# EAGLE board IR (EAGLE 9.2.0)
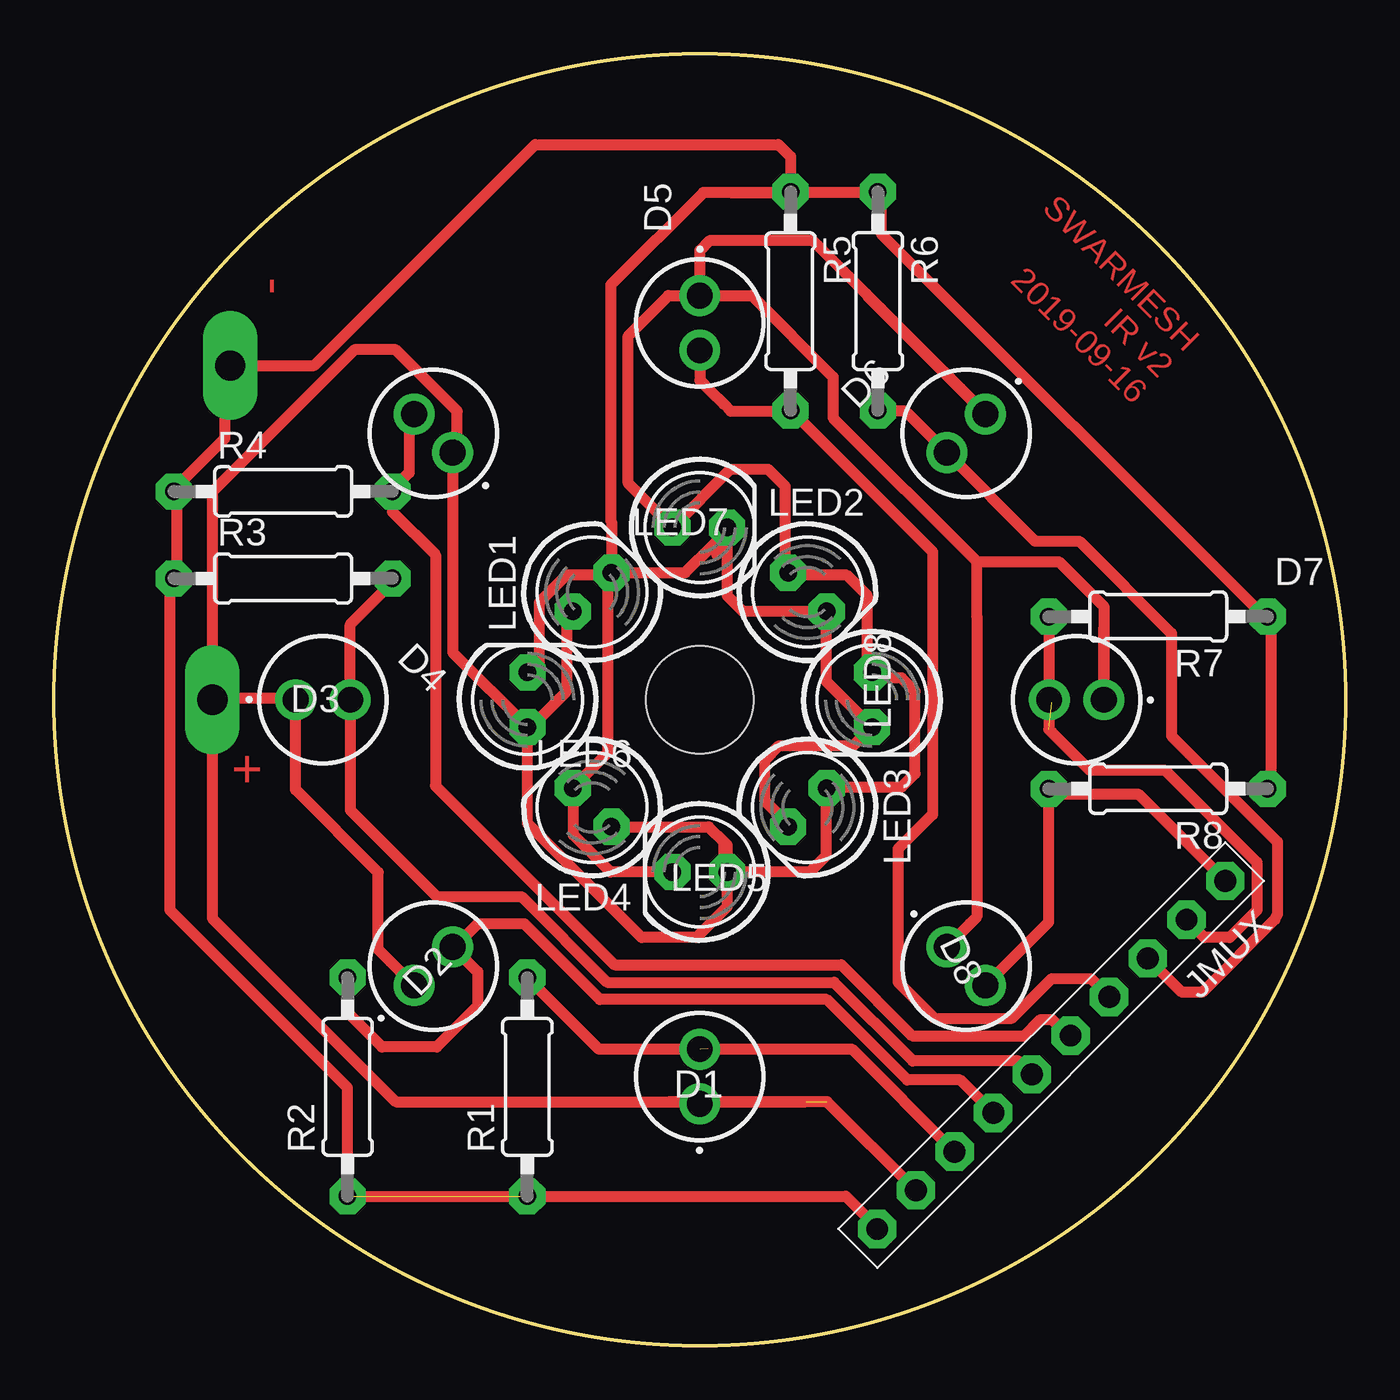
[diagram p0: board, top side]

Size 60 x 60 mm. Coordinates in mm from the lower left corner, seen from the top.
Outline: circle at 30,30 radius 30
Copper layers (1*16): Top 0.035mm / dielectric 1.5mm / Bottom 0.035mm
Design rules "default *": minimum track width 0.5mm, minimum drill 0.35mm, track to track 12mil, track to pad 12mil, pad to pad 12mil, via to via 12mil, smd to smd 6mil, copper to edge 40mil, drill to drill 6mil, minimum pad ring 10mil, minimum via ring 8mil, stop-mask expansion 4mil, vias tented up to drill 0mil, thermal gap 10mil
Holes 5 mm at 30,30

## Footprints (pad centres in the part's own frame; a part is rotated, then mirrored left to right if it is on the bottom)
SFH213_1 = drill 1.2 pad 1.9: 1 -1.27,0; 2 1.27,0
1X10-BIG = drill 1.016 pad 1.778 octagon: 1 -11.43,0; 2 -8.89,0; 3 -6.35,0; 4 -3.81,0; 5 -1.27,0; 6 1.27,0; 7 3.81,0; 8 6.35,0; 9 8.89,0; 10 11.43,0
1X1-BIGPOGO = drill 1.4 pad 2.54 long: P$1 0,0
LED5MM = drill 0.813 pad 1.676 octagon: A -1.27,0; K 1.27,0
0207/10 = drill 0.813 pad 1.676 octagon: 1 -5.08,0; 2 5.08,0

## Placement (x,y rotation side)
D1  SFH_203_PFA  [SFH213_1]  30,12.5 90 top
D2  SFH_203_PFA  [SFH213_1]  17.63,17.63 45 top
D3  SFH_203_PFA  [SFH213_1]  12.5,30 0 top
D4  SFH_203_PFA  [SFH213_1]  17.63,42.37 135 top
D5  SFH_203_PFA  [SFH213_1]  30,47.5 270 top
D6  SFH_203_PFA  [SFH213_1]  42.37,42.37 225 top
D7  SFH_203_PFA  [SFH213_1]  47.5,30 180 top
D8  SFH_203_PFA  [SFH213_1]  42.37,17.63 315 top
JMUX  PINHD-1X10  [1X10-BIG]  46.33,13.5 225 top
JP9  GND  [1X1-BIGPOGO]  8.19,45.52 90 top
JP10  3.3  [1X1-BIGPOGO]  7.37,30 90 top
LED1  [LED5MM]  22,30 90 top
LED2  [LED5MM]  30,38 0 top
LED3  [LED5MM]  38,30 270 top
LED4  [LED5MM]  30,22 180 top
LED5  [LED5MM]  35,25 225 top
LED6  [LED5MM]  25,25 135 top
LED7  [LED5MM]  25,35 45 top
LED8  [LED5MM]  35,35 315 top
R1  [0207/10]  21.99,12.02 90 top
R2  [0207/10]  13.64,12.02 90 top
R3  [0207/10]  10.65,35.63 0 top
R4  [0207/10]  10.65,39.67 0 top
R5  [0207/10]  34.22,48.51 270 top
R6  [0207/10]  38.27,48.51 270 top
R7  [0207/10]  51.29,33.87 180 top
R8  [0207/10]  51.29,25.86 180 top

## Library data of the parts
D1-D8 = SFH_203_PFA; ALLIED_NUMBER: 70339002; ALLIED_PRICE-STOCK: https://www.alliedelec.com/osram-opto-semiconductors-sfh-203-pfa/70339002/; DESCRIPTION: IR T-1 PIN Photodiode 150,SFH203PFA Osram Opto SFH 203 PFA IR Si Photodiode, 75 , Through Hole 5mm package; HEIGHT: mm; MANUFACTURER_NAME: OSRAM Opto Semiconductors; MANUFACTURER_PART_NUMBER: SFH 203 PFA; MOUSER_PART_NUMBER: 720-SFH203PFA; MOUSER_PRICE-STOCK: https://www.mouser.com/Search/Refine.aspx?Keyword=720-SFH203PFA; RS_PART_NUMBER: 6548665; RS_PRICE-STOCK: https://uk.rs-online.com/web/p/products/6548665
JMUX JP9 JP10 LED1-LED8 R1-R8 = adafruit

## Nets
GND: JMUX.10 JP9.P$1 LED1.K LED2.K LED3.K LED4.K LED5.K LED6.K LED7.K LED8.K R1.1 R2.1 R3.1 R4.1 R5.1 R6.1 R7.1 R8.1
N$1: D1.2 JMUX.8 R1.2
N$2: D2.2 JMUX.7 R2.2
N$3: D3.2 JMUX.6 R3.2
N$4: D4.2 JMUX.5 R4.2
N$5: D5.2 JMUX.4 R5.2
N$6: D6.2 JMUX.3 R6.2
N$7: D7.2 JMUX.2 R7.2
N$8: D8.2 JMUX.1 R8.2
VCC: D1.1 D2.1 D3.1 D4.1 D5.1 D6.1 D7.1 D8.1 JMUX.9 JP10.P$1 LED1.A LED2.A LED3.A LED4.A LED5.A LED6.A LED7.A LED8.A

## Tracks (layer width: path | path; a pad name or v marks a point on that pad's centre or on a via)
GND  (1 unrouted)
  Top 0.5: 38.1,5.62 JMUX.10 38.3,5.42 | 22.23,6.89 R1.1 | R8.1 56.52,25.94 56.52,33.56 R7.1 56.2,33.88 38.42,51.66 38.42,53.56 R6.1 38.1,53.56 34.29,53.56 | 34.29,53.56 R5.1 | 25.72,35.78 23.81,35.78 22.54,34.51 22.54,31.66 22.23,31.34 LED1.K | 25.72,35.78 25.72,27.53 24.13,25.94 LED6.K 24.13,25.62 24.13,23.72 25.85,22 LED4.K | 25.72,35.78 LED7.K | 30.64,37.21 31.11,37.69 LED2.K 31.27,34.83 32,34.1 LED8.K 35.88,33.88 35.88,30.85 LED3.K 37.12,27.84 33.66,27.84 33.02,27.21 33.02,25.3 34.1,24.22 LED5.K | R5.1 33.97,53.56 31.43,53.56 | 26.04,36.1 LED7.K | 30.8,36.73 30.8,37.05 30.64,37.21 | 38.3,5.42 36.78,6.94 R2.1 13.64,11.98 5.4,20.23 5.4,35.47 R3.1 5.71,35.78 5.71,39.59 R4.1 5.71,39.91 7.94,42.13 7.94,45.31 JP9.P$1 12.1,45.52 22.36,55.78 33.66,55.78 34.22,55.23 R5.1 | 38.73,4.99 38.3,5.42 | 34.29,53.56 30.16,53.56 25.86,49.27 25.86,38.31 25.9,38.27 LED7.K | LED7.K 29.33,35.9 30.64,37.21
N$1  (1 unrouted)
  Top 0.5: R1.2 25.31,13.78 30.39,13.78 | 30.39,13.78 29.98,14.19 | JMUX.8 37.06,13.78 30.39,13.78
N$2
  Top 0.5: R2.2 13.64,15.48 15.24,13.88 17.78,13.88 19.68,15.78 19.68,17.37 D2.2 18.73,18.64 19.68,19.59 21.85,19.59 25.37,16.07 35.91,16.07 39.64,12.34 42.1,12.34 JMUX.7
N$3
  Top 0.5: 15.56,35.47 R3.2 15.73,35.47 13.77,33.51 D3.2 13.77,24.87 17.78,20.86 21.72,20.86 25.7,16.88 36.24,16.88 39.89,13.23 44.8,13.23 JMUX.6
N$4
  Top 0.5: D4.2 16.51,43.09 16.51,40.55 15.88,39.91 R4.2 15.73,38.73 17.72,36.73 17.72,26 26.04,17.68 36.57,17.68 39.86,14.4 45.09,14.4 45.83,15.14 46.35,15.14 47.1,14.4 JMUX.5
N$5
  Top 0.5: R5.2 34.29,43.4 | 34.29,43.4 40.81,36.88 40.81,24.67 39.21,23.07 39.21,16.89 40.9,15.2 44.51,15.2 46.35,17.05 48.16,17.05 JMUX.4 | D5.2 30,44.84 30.48,44.35 31.11,43.72 31.43,43.4 34.29,43.4
N$6
  Top 0.5: R6.2 38.42,43.4 39.54,43.4 D6.2 45.57,37.37 47.62,37.37 51.91,33.08 51.91,28.32 56.83,23.4 56.83,20.05 56.71,19.79 53.34,16.41 52.39,16.41 JMUX.3
N$7  (1 unrouted)
  Top 0.5: JMUX.2 53.44,18.95 54.61,18.95 55.88,20.23 55.88,22.45 51.59,26.73 48.1,26.73 46.99,27.84 46.35,28.48 46.21,28.62 R7.2 | 46.35,29.88 D7.2
N$8
  Top 0.5: JMUX.1 50.37,25.62 46.35,25.62 R8.2 46.21,19.68 D8.2
VCC  (1 unrouted)
  Top 0.5: 28.89,38.01 LED2.A | 40.01,7.53 JMUX.9 35.92,11.34 28.57,11.34 | JP10.P$1 7.62,30.07 11.11,30.07 D3.1 11.23,25.82 15.07,21.98 15.07,18.39 D2.1 | LED1.A 22.23,28.8 23.81,30.38 23.81,33.88 LED7.A | 21.91,28.48 LED1.A | 29.84,11.34 D1.1 | 29.84,11.34 34.92,11.34 | LED1.A 18.53,32.2 D4.1 18.73,41.18 18.73,43.4 15.88,46.26 13.97,46.26 7.37,39.66 JP10.P$1 | 29.84,11.34 15.88,11.34 7.37,19.84 JP10.P$1 | LED2.A 28.65,38.08 | LED1.A 22,24.26 27.3,18.95 29.84,18.95 31.27,20.38 LED4.A | LED2.A 31.43,40.7 33.18,40.7 33.97,39.91 33.97,36.1 LED8.A 34.29,35.78 36.83,35.78 37.78,34.83 37.78,31.34 LED3.A 38.25,31.02 39.37,31.02 40.01,30.38 40.01,26.57 39.37,25.94 36.2,25.94 LED5.A 35.88,25.62 35.88,22.77 35.11,22 LED4.A | LED2.A 26.67,40.06 26.67,46.9 28.55,48.77 D5.1 | 37.77,48.77 D6.1 43.18,43.4 35.24,51.34 30.48,51.34 30,50.86 D5.1 | LED4.A 31.11,22.16 31.11,23.4 | LED6.A 30.41,24.1 31.11,23.4 | 31.11,23.4 31.27,23.25 LED4.A | D8.1 42.54,19.6 42.86,19.92 42.86,33.88 42.86,36.1 42.86,36.42 | 48.77,33.37 D7.1 48.77,34.32 46.67,36.42 42.86,36.42 | D5.1 32.41,48.77 36.2,44.99 36.2,43.09 42.86,36.42

## Text on the board
Top: - | SWARMESH / IR v2 / 2019-09-16 | +